# Altium PCB RobotCtrl_V2_Core-board.PcbDoc
Units mil, origin at the board's own origin, x right, y up, seen from the top; angles counter-clockwise.
Board outline 8575 x 6590 mil, 2 copper layers (Top Layer, Bottom Layer); 42 components, 126 nets, 353 pads, 40 vias.
Unrouted connection lines stored in the file: 210.
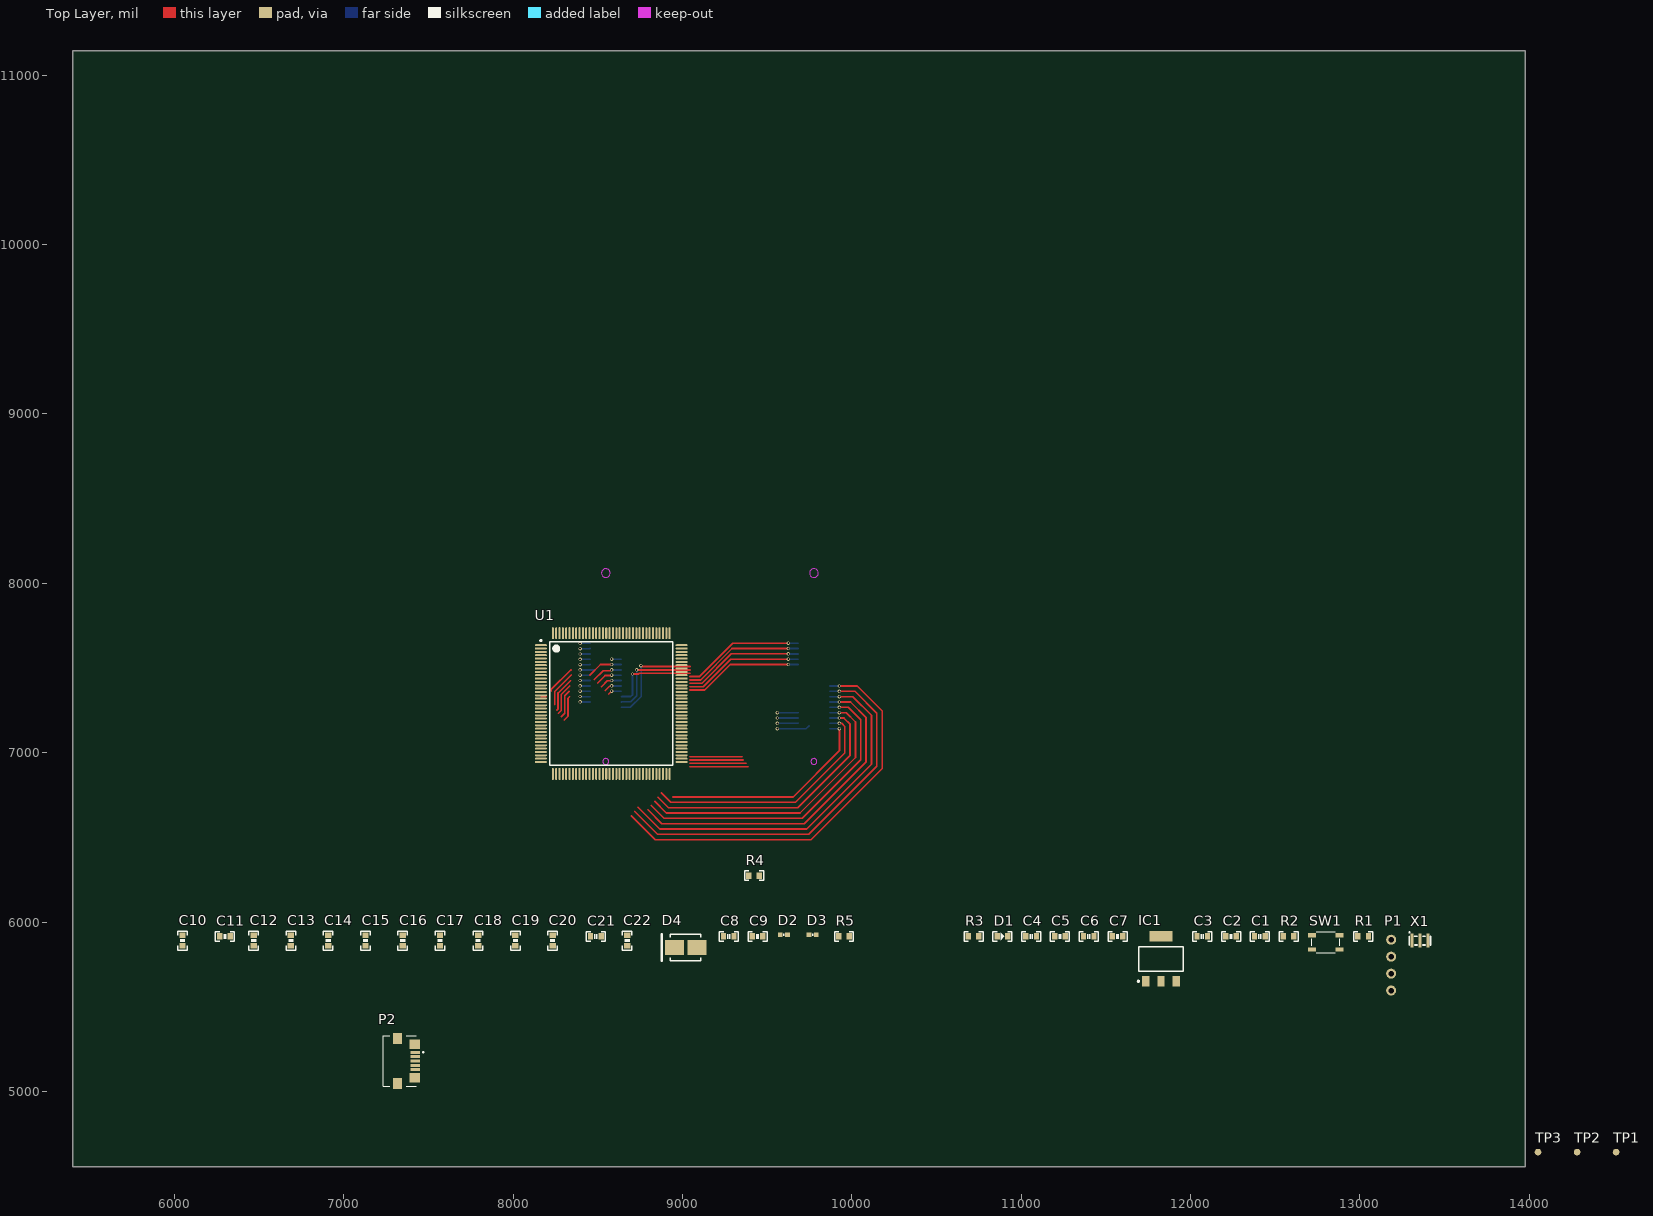
[diagram p0: Top Layer view]
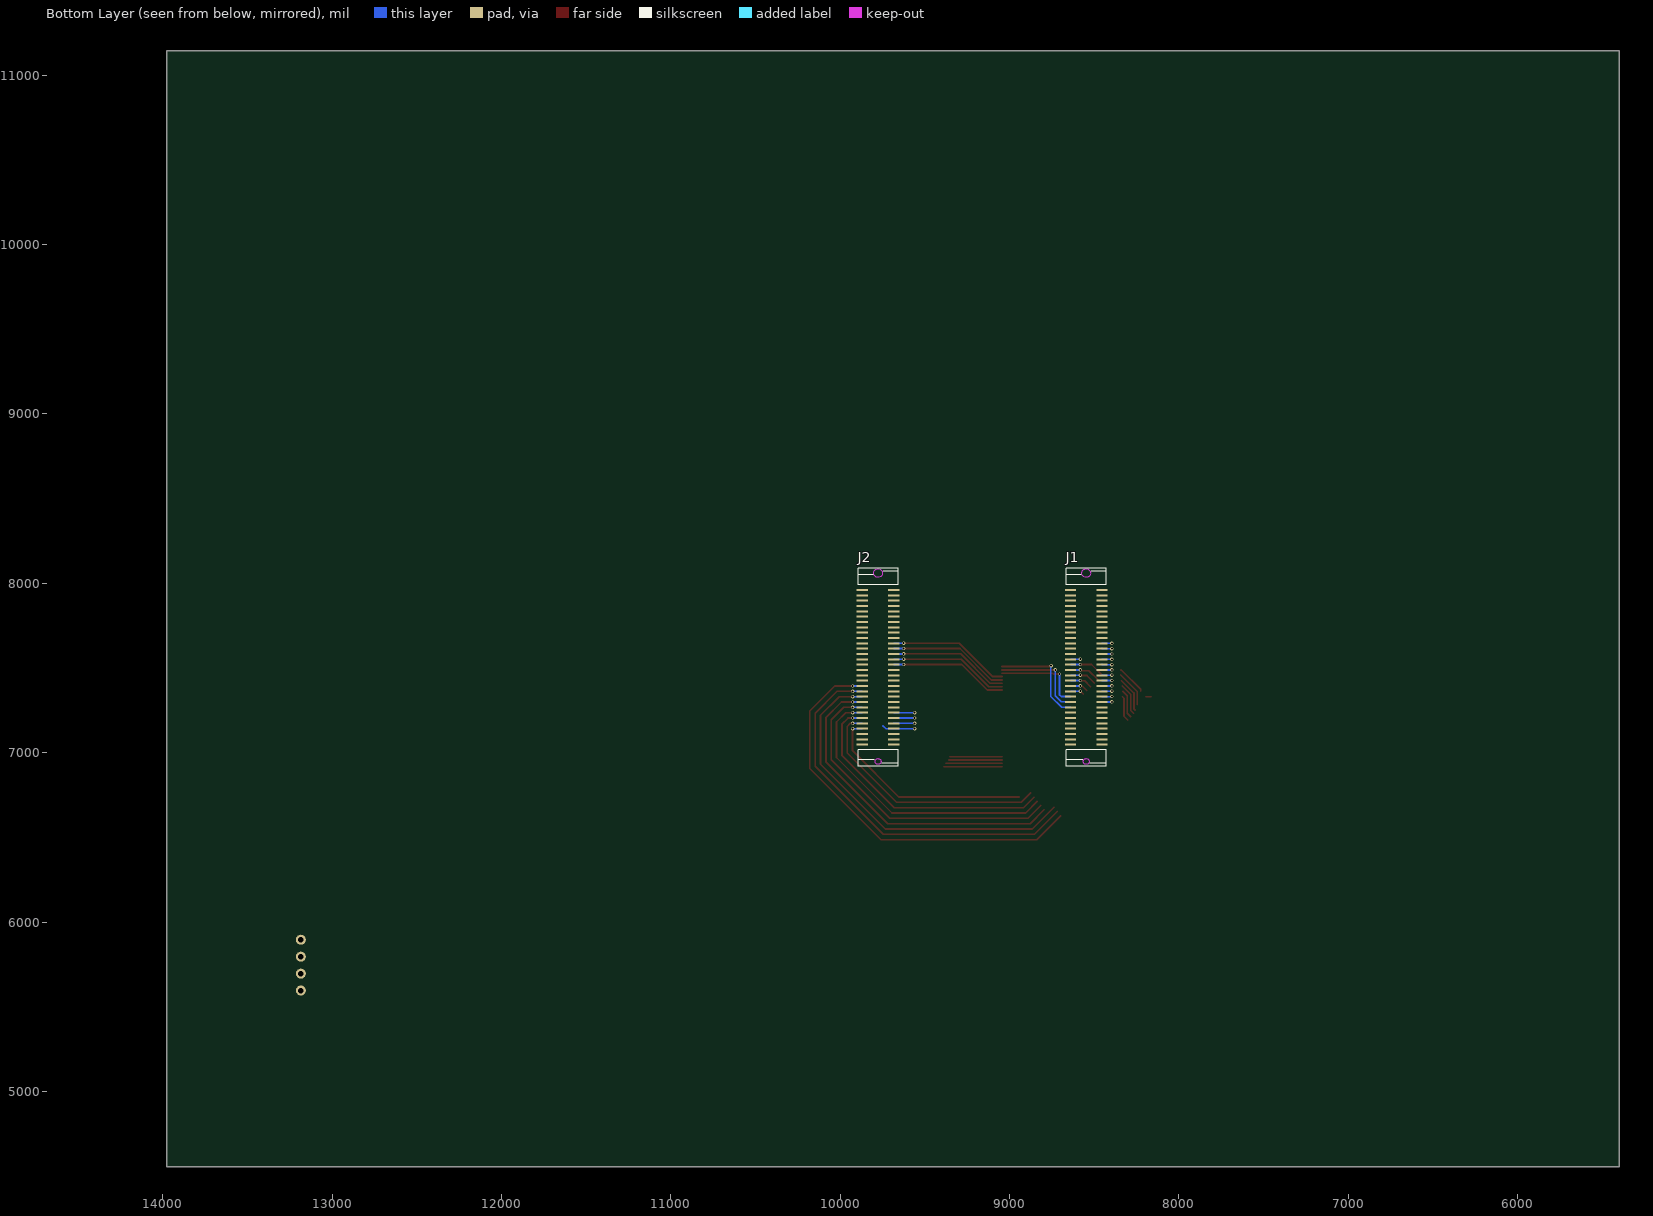
[diagram p1: Bottom Layer view, seen from below]

## Layer stack, top to bottom
Top Solder: solder mask 0.4, Solder Resist, Dk 3.5
Top Layer: signal copper 1.4
Dielectric 1: dielectric 12.6, FR-4, Dk 4.8
Bottom Layer: signal copper 1.4
Bottom Solder: solder mask 0.4, Solder Resist, Dk 3.5

## Board outline
5400,4555 13975,4555 13975,11145 5400,11145

## Design rules (kind name [scope] priority, off if disabled: settings)
Clearance [All] p1: gap=15 ignorepadtopadclearanceinfootprint=FALSE except(0: Arc-Hole Track-Hole SMDPad-Hole THPad-Hole Via-Hole Fill-Hole Poly-Hole Region-Hole Text-Hole; 2: Arc-SMDPad Track-SMDPad SMDPad-SMDPad; 9.6: Arc-Arc Arc-Track Track-Track; 10: Arc-THPad Arc-Via Arc-Text Track-THPad Track-Via Track-Text SMDPad-THPad SMDPad-Via SMDPad-Text THPad-THPad THPad-Via THPad-Text Via-Via Via-Text Fill-Text Poly-Text Region-Text Text-Text)
PlaneConnect [All] p1: planeconnectstyle=Direct reliefexpansion=20 reliefentries=4 reliefconductorwidth=10 reliefairgap=10
PolygonConnect [All] p1: connectstyle=Direct reliefconductorwidth=10 reliefentries=4 polygonreliefangle="90 Angle" airgapwidth=10
RoutingVias [All] p1: holewidth=11.81 width=19.68 viastyle="Through Hole" minholewidth=11.81 minwidth=19.68 maxholewidth=11.81 maxwidth=19.68
SolderMaskExpansion [All] p1: expansion=4 istentingtop=FALSE
Width [All] p1: maxlimit=100 minlimit=10 preferedwidth=10
29 further rules are at their usual default settings.

## Components (designator, comment, footprint, x,y, rotation, side; value= is the part's Value field where it differs from the comment)
C1 "2.2uF" CAP-0603 12409,5915.87 r0 top
C2 "100nF" CAP-0603 12239,5915.87 r0 top
C3 "2.2uF" CAP-0603 12069,5915.87 r0 top
C4 "10uF" CAP-0603 11059,5915.87 r0 top
C5 "100nF" CAP-0603 11229,5915.87 r0 top
C6 "100nF" CAP-0603 11399,5915.87 r0 top
C7 "10uF" CAP-0603 11569,5915.87 r0 top
C8 "1uF" CAP-0603 9274,5915.87 r0 top
C9 "100nF" CAP-0603 9444,5915.87 r0 top
C10 "10uF" CAP-0603 6049,5890.87 r90 top
C11 "100nF" CAP-0603 6299,5915.87 r0 top
C12 "100nF" CAP-0603 6469,5890.87 r90 top
C13 "100nF" CAP-0603 6689,5890.87 r90 top
C14 "100nF" CAP-0603 6909,5890.87 r90 top
C15 "100nF" CAP-0603 7129,5890.87 r90 top
C16 "100nF" CAP-0603 7349,5890.87 r90 top
C17 "100nF" CAP-0603 7569,5890.87 r90 top
C18 "100nF" CAP-0603 7794,5890.87 r90 top
C19 "100nF" CAP-0603 8014,5890.87 r90 top
C20 "100nF" CAP-0603 8234,5890.87 r90 top
C21 "100nF" CAP-0603 8489,5915.87 r0 top
C22 "100nF" CAP-0603 8674,5890.87 r90 top
D1 "RED" LED-0603 10889,5915.87 r0 top
D2 "PESD0402-140" D-0402 9599,5925.87 r0 top
D3 "PESD0402-140" D-0402 9769,5925.87 r0 top
D4 "SMBJ15CA" DO-214AA/SMB 9019,5850.87 r0 top
IC1 "AMS1117-3.3" SOT-223 11849,5775.87 r0 top
J1 "3710M060037G3FT01" 3710M060037G3FT01 8640.04,7047.56 r0 bottom locked
J2 "3710M060037G3FT01" 3710M060037G3FT01 9868.94,7047.56 r0 bottom locked
P1 "HDR1x4_2.54" HDR1x4_2.54_180 13184,5895.87 r0 top
P2 "MicroQTJ" USB-MICRO 7345,5180 r270 top
R1 "10k" R-0603 13019,5915.87 r0 top
R2 "120R" R-0603 12579,5915.87 r0 top
R3 "4.7k" R-0603 10719,5915.87 r0 top
R4 "10R" R-0603 9423,6274 r0 top
R5 "10R" R-0603 9954,5915.87 r0 top
SW1 "KEY" KEY-4P-4.2*3.4*2.5 12799,5880.87 r0 top
TP1 "TestPoint" TestPoint 14512,4642 r90 top
TP2 "TestPoint" TestPoint 14282,4642 r90 top
TP3 "TestPoint" TestPoint 14051,4642 r90 top
U1 "STM32F407ZET6" STM-LQFP144_N 8580,7290 r0 top
X1 "8MHz" SMD3213-3P 13354,5890.87 r0 top

## Footprints (in the part's own frame and the unit in brackets; to place one, negate y for a bottom-side part, rotate by r counter-clockwise, add the part's x,y. Pads: shape width x height; smd on the part's side, far side on the other; paste and mask are expansions set on the pad)
3710M060037G3FT01 [mm]
  rect 1.7x0.3 smd: 1(-4.7,0) 2(-4.7,-0.8) 3(-4.7,-1.6) 4(-4.7,-2.4) 5(-4.7,-3.2) 6(-4.7,-4) 7(-4.7,-4.8) 8(-4.7,-5.6) 9(-4.7,-6.4) 10(-4.7,-7.2) 11(-4.7,-8) 12(-4.7,-8.8) 13(-4.7,-9.6) 14(-4.7,-10.4) 15(-4.7,-11.2) 16(-4.7,-12) 17(-4.7,-12.8) 18(-4.7,-13.6) 19(-4.7,-14.4) 20(-4.7,-15.2) 21(-4.7,-16) 22(-4.7,-16.8) 23(-4.7,-17.6) 24(-4.7,-18.4) 25(-4.7,-19.2) 26(-4.7,-20) 27(-4.7,-20.8) 28(-4.7,-21.6) 29(-4.7,-22.4) 30(-4.7,-23.2) 31(0,-23.2) 32(0,-22.4) 33(0,-21.6) 34(0,-20.8) 35(0,-20) 36(0,-19.2) 37(0,-18.4) 38(0,-17.6) 39(0,-16.8) 40(0,-16) 41(0,-15.2) 42(0,-14.4) 43(0,-13.6) 44(0,-12.8) 45(0,-12) 46(0,-11.2) 47(0,-10.4) 48(0,-9.6) 49(0,-8.8) 50(0,-8) 51(0,-7.2) 52(0,-6.4) 53(0,-5.6) 54(0,-4.8) 55(0,-4) 56(0,-3.2) 57(0,-2.4) 58(0,-1.6) 59(0,-0.8) 60(0,0)
  Keep-Out Layer circle w0.152: c-2.35,-25.725 r0.65
  Keep-Out Layer circle w0.152: c-2.35,2.525 r0.45
  silkscreen extent -5.35,-26.47 0.65,3.27
CAP-0603 [mm]
  rect 0.8x0.96 smd: 1(-0.79,0) 2(0.79,0)
  silkscreen extent -1.42,-0.71 1.42,0.71, body extent -0.76,-0.39 0.76,0.39, height 0.9
D-0402 [mm]
  rect 0.7x0.65 smd: 1(-0.55,0) 2(0.55,0)
  silkscreen extent 0,-0.15 0,0.15, body extent -0.5,-0.25 0.5,0.25, height 0.43
DO-214AA/SMB [mm]
  rect 2.85x2.25 smd: 1(1.675,0) 2(-1.675,0)
  silkscreen extent -3.6,-2 2.3,2, body extent -2.5,-1.97 2.5,1.97, height 2.44
HDR1x4_2.54_180 [mm]
  round 1.5 hole 0.813: 1(0,0) 2(0,-2.54) 3(0,-5.08) 4(0,-7.62)
  body extent -1.25,-8.89 1.25,1.27, height 8.2
KEY-4P-4.2*3.4*2.5 [mm] "SKRPABE010"
  rect 1.2x0.65 smd: 1(-2.075,1.075) 1(2.075,1.075) 2(-2.075,-1.075) 2(2.075,-1.075)
  silkscreen extent -2.15,-1.6 2.05,1.6, body extent -2.35,-1.6 2.25,1.6, height 2.5
LED-0603 [mm]
  rect 0.8x0.96 smd: 1(-0.79,0) 2(0.79,0)
  silkscreen extent -1.42,-0.71 1.42,0.71, body extent -0.81,-0.4 0.81,0.4, height 0.6
R-0603 [mm]
  rect 0.8x0.96 smd: 1(-0.79,0) 2(0.79,0)
  silkscreen extent -1.42,-0.71 1.42,0.71, body extent -0.76,-0.38 0.76,0.38, height 0.41
SMD3213-3P [mm]
  rect 0.4x2.1 smd: 1(-1.2,0) 2(0,0) 3(1.2,0)
  silkscreen extent -1.6,-0.65 1.6,1.27, body extent -1.6,-0.65 1.6,0.65, height 0.7
SOT-223 [mm]
  rect 1.1x1.55 smd: 1(-2.91,-3.197) 2(-0.61,-3.197) 3(1.69,-3.197)
  rect 3.45x1.55 smd: 4(-0.61,3.553)
  silkscreen extent -4.11,-3.3 2.74,2.03, body extent -3.88,-3.38 2.62,3.58, height 1.7
STM-LQFP144_N [mm] "Thin QFP, 144-Leads, Body 20x20mm, Pitch 0.5mm, IPC Medium Density"
  oval 1.8x0.3 smd: 1(-10.55,8.75) 2(-10.55,8.25) 3(-10.55,7.75) 4(-10.55,7.25) 5(-10.55,6.75) 6(-10.55,6.25) 7(-10.55,5.75) 8(-10.55,5.25) 9(-10.55,4.75) 10(-10.55,4.25) 11(-10.55,3.75) 12(-10.55,3.25) 13(-10.55,2.75) 14(-10.55,2.25) 15(-10.55,1.75) 16(-10.55,1.25) 17(-10.55,0.75) 18(-10.55,0.25) 19(-10.55,-0.25) 20(-10.55,-0.75) 21(-10.55,-1.25) 22(-10.55,-1.75) 23(-10.55,-2.25) 24(-10.55,-2.75) 25(-10.55,-3.25) 26(-10.55,-3.75) 27(-10.55,-4.25) 28(-10.55,-4.75) 29(-10.55,-5.25) 30(-10.55,-5.75) 31(-10.55,-6.25) 32(-10.55,-6.75) 33(-10.55,-7.25) 34(-10.55,-7.75) 35(-10.55,-8.25) 36(-10.55,-8.75) 73(10.55,-8.75) 74(10.55,-8.25) 75(10.55,-7.75) 76(10.55,-7.25) 77(10.55,-6.75) 78(10.55,-6.25) 79(10.55,-5.75) 80(10.55,-5.25) 81(10.55,-4.75) 82(10.55,-4.25) 83(10.55,-3.75) 84(10.55,-3.25) 85(10.55,-2.75) 86(10.55,-2.25) 87(10.55,-1.75) 88(10.55,-1.25) 89(10.55,-0.75) 90(10.55,-0.25) 91(10.55,0.25) 92(10.55,0.75) 93(10.55,1.25) 94(10.55,1.75) 95(10.55,2.25) 96(10.55,2.75) 97(10.55,3.25) 98(10.55,3.75) 99(10.55,4.25) 100(10.55,4.75) 101(10.55,5.25) 102(10.55,5.75) 103(10.55,6.25) 104(10.55,6.75) 105(10.55,7.25) 106(10.55,7.75) 107(10.55,8.25) 108(10.55,8.75)
  oval 0.3x1.8 smd: 37(-8.75,-10.55) 38(-8.25,-10.55) 39(-7.75,-10.55) 40(-7.25,-10.55) 41(-6.75,-10.55) 42(-6.25,-10.55) 43(-5.75,-10.55) 44(-5.25,-10.55) 45(-4.75,-10.55) 46(-4.25,-10.55) 47(-3.75,-10.55) 48(-3.25,-10.55) 49(-2.75,-10.55) 50(-2.25,-10.55) 51(-1.75,-10.55) 52(-1.25,-10.55) 53(-0.75,-10.55) 54(-0.25,-10.55) 55(0.25,-10.55) 56(0.75,-10.55) 57(1.25,-10.55) 58(1.75,-10.55) 59(2.25,-10.55) 60(2.75,-10.55) 61(3.25,-10.55) 62(3.75,-10.55) 63(4.25,-10.55) 64(4.75,-10.55) 65(5.25,-10.55) 66(5.75,-10.55) 67(6.25,-10.55) 68(6.75,-10.55) 69(7.25,-10.55) 70(7.75,-10.55) 71(8.25,-10.55) 72(8.75,-10.55) 109(8.75,10.55) 110(8.25,10.55) 111(7.75,10.55) 112(7.25,10.55) 113(6.75,10.55) 114(6.25,10.55) 115(5.75,10.55) 116(5.25,10.55) 117(4.75,10.55) 118(4.25,10.55) 119(3.75,10.55) 120(3.25,10.55) 121(2.75,10.55) 122(2.25,10.55) 123(1.75,10.55) 124(1.25,10.55) 125(0.75,10.55) 126(0.25,10.55) 127(-0.25,10.55) 128(-0.75,10.55) 129(-1.25,10.55) 130(-1.75,10.55) 131(-2.25,10.55) 132(-2.75,10.55) 133(-3.25,10.55) 134(-3.75,10.55) 135(-4.25,10.55) 136(-4.75,10.55) 137(-5.25,10.55) 138(-5.75,10.55) 139(-6.25,10.55) 140(-6.75,10.55) 141(-7.25,10.55) 142(-7.75,10.55) 143(-8.25,10.55) 144(-8.75,10.55)
  silkscreen extent -10.67,-9.25 9.25,9.57, body extent -10,-10 10,10, height 1.6
TestPoint [mm]
  round 1 smd: 1(0,0)
USB-MICRO [mm]
  rect 0.45x1.38 smd: 1(-1.3,1.975) 2(-0.65,1.975) 3(0,1.975) 4(0.65,1.975) 5(1.3,1.975)
  rect 1.65x1.3 smd: EH(-3.375,-0.685) EH(3.375,-0.685)
  rect 1.425x1.55 smd: EH(-2.487,1.89) EH(2.487,1.89)
  silkscreen extent -3.75,-2.84 3.75,3.26, body extent -3.9,-2.5 3.9,2.5, height 2.72

## Part data
C1 C2 C3 C4 C5 C6 C7 C8 C9 C10 C11 C12 C13 C14 C15 C16 C17 C18 C19 C20 C21 C22: library part CAP, "贴片电容", Package=0402, SuppliersPartNumber=C52923, ComponentLink1Description=供应商链接, ComponentLink1URL=http://www.szlcsc.com/product/details_53938.html, Supplier=LC
D1: library part LED, "发光二极管", Package=0603, SuppliersPartNumber=C2290, ComponentLink1Description=供应商链接, ComponentLink1URL=http://www.szlcsc.com/product/details_2663.html, Supplier=LC
D2 D3 D4: library part TVS_C
IC1: library part AMS1117, "AMS1117-3.3 1.0A", Manufacturer_Name=Nexperia, Manufacturer_Part_Number=SI2302DS, Mouser Part Number=N/A, RS Part Number=7983053P, Datasheet Link=https://assets.nexperia.com/documents/data-sheet/SI2302DS.pdf, Height=1.1mm, Mouser Price/Stock=https://www.mouser.com/Search/Refine.aspx?Keyword=N%2FA, RS Price/Stock=http://uk.rs-online.com/web/p/products/7983053P
J1 J2: library part 3710M/F, "B2B Connector"
P1: "Header"
P2: library part USB_MICRO, "USB_MICRO"
R1 R2 R3 R4 R5: library part RES, "贴片电阻", Package=0805, SuppliersPartNumber=C17798, Supplier=LC
SW1: "按键开关"
TP1 TP2 TP3: "测试点"
U1: "ARM Cortex-M4 32-bit MCU+FPU, 210 DMIPS, 512 kB Flash, 192 kB Internal RAM, 114 I/Os, 144-pin LQFP, -40 to 85 degC, Tray", I/Os (High Current)=114, Manufacturer=STMicroelectronics, Operating Frequency(F) (Processor speed) (MHz)=168, Supplier Part Number 1=497-11903-ND, Supply Voltage(Vcc) max (V)=3.6, Supply Voltage(Vcc) min (V)=1.8, ComponentLink1Description="Manufacturer URL", ComponentLink1URL=http://www.st.com/web/en/home.html, ComponentLink2Description=Datasheet, ComponentLink2URL=http://www.st.com/st-web-ui/static/active/en/resource/technical/document/datasheet/DM00037051.pdf, ComponentLink3Description="Package Specification", ComponentLink3URL=http://www.st.com/st-web-ui/static/active/en/resource/technical/document/datasheet/DM00037051.pdf, Core="ARM Cortex-M4", D/A Converter=2x12-bit, DatasheetVersion="Rev. 4", FLASH Size (Prog) (kB)=512, Internal RAM Size (kB)=192, Mounting Technology="Surface Mount", PackageDescription="144-Pin Low Profile Quad Flat Package, 20 x 20 mm Body, 0.5 mm Pitch", PackageReference=LQFP144, PackageVersion="Rev. 4, 06/2013", Packing=Tray, PartNumber=STM32F407ZET6, Supplier 1=Digi-Key, Supplier 2=Farnell, Supplier 3=Newark, Supplier 4=Newark, Supplier 5=Mouser, Supplier Part Number 2=2215229, Supplier Part Number 3=46W2203, Supplier Part Number 4=87T3795, Supplier Part Number 5=511-STM32F407ZET6
X1: library part XTAL, "CSTCE8M00G15C99-R0"

## Via types
v1: diameter 19.68, hole 11.81, Top Layer to Bottom Layer, 40 vias

## Nets (pads, with @x,y where several pads share a name; then routed paths per layer and width w, separated by ;. In a path a pad name is that pad's centre, name@x,y a point inside that pad or via, vN(x,y) a via of type N, cw(c..) or ccw(c..) an arc to the next point about the centre after c; other vN are vias at no path point)
GND: C1.2 C2.1 C3.2 C4.1 C5.1 C6.1 C7.1 C8.1 C9.1 C10.1 C11.1 C12.1 C13.1 C14.1 C15.1 C16.1 C17.1 C18.1 C19.1 C20.1 C21.1 C22.1 D1.2 D2.1 D3.1 D4.2 IC1.1 J1.1 J1.30 J2.31 P1.1 P2.5 R1.1 SW1.2 TP3.1 U1.16 U1.31 U1.38 U1.51 U1.61 U1.83 U1.94 U1.107 U1.120 U1.130 X1.2
NetC1_1: C1.1 U1.71
NetC2_2: C2.2 SW1.1 U1.25
NetC3_1: C3.1 U1.106
NetD1_A: D1.1 R3.1
NetD4_1: D4.1 P2.EH
NetP2_2: P2.2 R4.2
NetP2_3: P2.3 R5.2
NetR1_2: R1.2 U1.138
NetR2_2: R2.2 U1.143
NetU1_23: U1.23 X1.3
NetU1_24: U1.24 X1.1
PA0: J2.42 U1.34
PA1: J1.3 U1.35
PA2: J1.4 U1.36
PA3: J1.44 U1.37 | length 57.9
  Bottom Layer w10: v1(8582,7551.98) 8582.24,7551.74 J1.44@8639.8,7551.74
PA4: J1.45 U1.40 | length 212
  Top Layer w10: 8453.93,7457.64 8516.77,7520.48 v1(8582,7520.48)
  Bottom Layer w10: v1(8582,7520.48) 8582.24,7520.24 J1.45@8639.8,7520.24
PA5: J1.46 U1.41 | length 183.9
  Top Layer w10: 8479.62,7431.94 8531.82,7484.14 8574.54,7484.14 8579.38,7488.98 v1(8582,7488.98)
  Bottom Layer w10: v1(8582,7488.98) 8582.24,7488.74 J1.46@8639.8,7488.74
PA6: J1.47 U1.42 | length 159.1
  Top Layer w10: 8499.78,7411.78 8543.63,7455.64 8580.15,7455.64 v1(8582,7457.49)
  Bottom Layer w10: v1(8582,7457.49) 8582.24,7457.25 J1.47@8639.8,7457.25
PA7: J1.48 U1.43 | length 133
  Top Layer w10: 8522.05,7389.51 8556.68,7424.14 8580.15,7424.14 v1(8582,7425.99)
  Bottom Layer w10: v1(8582,7425.99) 8582.24,7425.75 J1.48@8639.8,7425.75
PA8: J2.20 U1.100 | length 720.4
  Top Layer w10: 9045,7449.37 9099.37,7449.37 9296.46,7646.46 v1(9625.86,7646.46)
  Bottom Layer w10: v1(9625.86,7646.46) 9626.1,7646.22 J2.20@9683.66,7646.22
PA9: J1.51 U1.101 | length 535.3
  Top Layer w10: v1(8705.16,7465) 8705.87,7464.29 8719.58,7464.29 8719.71,7464.16 8740.29,7464.16 8745.19,7469.06 9045,7469.06
  Bottom Layer w10: J1.51@8640.28,7330.78 8641.43,7331.93 8694.93,7331.93 8706,7343 8706,7464.16 v1(8705.16,7465)
PA10: J1.52 U1.102 | length 572.7
  Top Layer w10: v1(8730,7489) 8730.17,7488.83 9044.91,7488.83 9045,7488.74
  Bottom Layer w10: J1.52@8640.52,7299.53 8641.43,7300.43 8694.43,7300.43 8730,7336 v1(8730,7489)
PA11: D2.2 J1.53 R4.1 U1.103 | length 618
  Top Layer w10: v1(8755,7513.67) 8757.62,7513.67 8762.86,7508.43 9045,7508.43
  Bottom Layer w10: J1.53 8693.03,7268.03 8756.84,7331.84 8756.84,7511.83 v1(8755,7513.67)
PA12: D3.2 J1.54 R5.1 U1.104
PA13: J1.43 P1.3 U1.105
PA14: J1.42 P1.2 U1.109
PA15: J1.41 U1.110
PB0: J1.56 U1.46
PB1: J1.57 U1.47
PB2: J1.55 U1.48
PB3: J1.21 U1.133
PB4: J1.22 U1.134
PB5: J1.23 U1.135
PB6: J1.24 U1.136
PB7: J1.25 U1.137
PB8: J1.26 U1.139
PB9: J1.27 U1.140
PB10: J2.2 U1.69
PB11: J2.1 U1.70
PB12: J2.4 U1.73 | length 537.7
  Top Layer w10: 9045,6917.87 9387.87,6917.87
  Bottom Layer w10: v1(9560.23,7142.28) 9683.15,7142.28 J2.4@9683.4,7142.03 ; J2.4 9730.05,7142.05 9748,7160
PB13: J2.5 U1.74 | length 455.8
  Top Layer w10: 9045,6937.56 9377.56,6937.56
  Bottom Layer w10: v1(9560.23,7173.78) 9683.15,7173.78 J2.5@9683.4,7173.52
PB14: J2.6 U1.75 | length 438.4
  Top Layer w10: 9045,6957.24 9360.08,6957.24
  Bottom Layer w10: v1(9560.23,7205.27) 9683.15,7205.27 J2.6@9683.4,7205.02
PB15: J2.7 U1.76 | length 430.2
  Top Layer w10: 9045,6976.93 9351.93,6976.93
  Bottom Layer w10: v1(9560.23,7236.77) 9683.15,7236.77 J2.7@9683.4,7236.52
PC0: U1.26
PC1: J1.9 U1.27 | length 57.6
  Bottom Layer w10: v1@8397.2,7299.77 J1.9@8454.76,7299.77
  other v1: 8396.96,7300.01
PC2: U1.28
PC3: U1.29
PC4: J1.49 U1.44 | length 107.1
  Top Layer w10: 8543.94,7367.62 8569.5,7393.18 8580.69,7393.18 v1(8582,7394.5)
  Bottom Layer w10: v1(8582,7394.5) 8582.24,7394.26 J1.49@8639.8,7394.26
PC5: J1.50 U1.45 | length 81.5
  Top Layer w10: 8565.28,7346.28 v1(8582,7363)
  Bottom Layer w10: v1(8582,7363) 8582.24,7362.76 J1.50@8639.8,7362.76
PC6: J2.16 U1.96 | length 700.8
  Top Layer w10: 9045,7370.63 9131.99,7370.63 9281.84,7520.48 v1(9625.86,7520.48)
  Bottom Layer w10: v1(9625.86,7520.48) 9626.1,7520.24 J2.16@9683.66,7520.24
PC7: J2.17 U1.97 | length 705.7
  Top Layer w10: 9045,7390.31 9123.83,7390.31 9285.49,7551.98 v1(9625.86,7551.98)
  Bottom Layer w10: v1(9625.86,7551.98) 9626.1,7551.74 J2.17@9683.66,7551.74
PC8: J2.18 U1.98 | length 710.6
  Top Layer w10: 9045,7410 9115.68,7410 9289.15,7583.47 v1(9625.86,7583.47)
  Bottom Layer w10: v1(9625.86,7583.47) 9626.1,7583.23 J2.18@9683.66,7583.23
PC9: J2.19 U1.99 | length 715.5
  Top Layer w10: 9045,7429.68 9107.52,7429.68 9292.81,7614.97 v1(9625.86,7614.97)
  Bottom Layer w10: v1(9625.86,7614.97) 9626.1,7614.73 J2.19@9683.66,7614.73
PC10: J1.40 U1.111
PC11: J1.39 U1.112
PC12: J1.38 U1.113
PC13: J1.28 U1.7
PC14: U1.8
PC15: U1.9
PD0: J2.47 U1.114
PD1: J2.48 U1.115
PD2: J1.37 U1.116
PD3: J1.36 U1.117
PD4: J2.26 U1.118
PD5: J2.22 U1.119
PD6: J2.27 U1.122
PD7: J1.35 U1.123
PD8: J2.58 U1.77
PD9: J2.59 U1.78
PD10: J2.60 U1.79
PD11: U1.80
PD12: J2.21 U1.81
PD13: J2.14 J2.23 U1.82
PD14: J2.45 U1.85
PD15: J2.46 U1.86
PE0: J2.43 U1.141
PE1: J2.44 U1.142
PE2: J1.20 U1.1 | length 58.8
  Bottom Layer w10: v1@8397.94,7645.48 J1.20@8455.5,7645.48 ; J1.20@8454.09,7646.89 J1.20
  other v1: 8396.96,7645.72
PE3: J1.19 U1.2 | length 58.8
  Bottom Layer w10: v1@8397.94,7613.99 J1.19@8455.5,7613.99 ; J1.19@8454.09,7615.39 J1.19
  other v1: 8396.96,7614.23
PE4: J1.18 U1.3 | length 58.8
  Bottom Layer w10: v1@8397.94,7582.49 J1.18@8455.5,7582.49 ; J1.18@8454.09,7583.9 J1.18
  other v1: 8396.96,7582.73
PE5: J1.17 U1.4 | length 58.8
  Bottom Layer w10: v1@8397.94,7551 J1.17@8455.5,7551 ; J1.17@8454.09,7552.4 J1.17
  other v1: 8396.96,7551.24
PE6: J1.16 U1.5 | length 58.8
  Bottom Layer w10: v1@8397.94,7519.5 J1.16@8455.5,7519.5 ; J1.16@8454.09,7520.91 J1.16
  other v1: 8396.96,7519.74
PE7: J2.49 U1.58 | length 2423.3
  Top Layer w10: 8698.54,6628.12 8839.66,6487 9759.34,6487 10178.97,6906.63 10178.97,7246.37 10031.8,7393.54 v1(9926.98,7393.54)
  Bottom Layer w10: J2.49@9869.18,7393.78 9926.74,7393.78 v1(9926.98,7393.54)
PE8: J2.50 U1.59 | length 2296.5
  Top Layer w10: 8718.23,6652.98 8852.71,6518.5 9746.29,6518.5 10147.47,6919.68 10147.47,7233.32 10018.76,7362.04 v1(9926.98,7362.04)
  Bottom Layer w10: J2.50@9869.18,7362.28 9926.74,7362.28 v1(9926.98,7362.04)
PE9: J2.51 U1.60 | length 2169.7
  Top Layer w10: 8737.91,6677.83 8865.76,6549.99 9733.25,6549.99 10115.98,6932.72 10115.98,7220.28 10005.71,7330.54 v1(9926.98,7330.54)
  Bottom Layer w10: J2.51@9869.18,7330.78 9926.74,7330.78 v1(9926.98,7330.54)
PE10: J2.52 U1.63 | length 1987.2
  Top Layer w10: 8796.97,6663.32 8878.8,6581.49 9720.2,6581.49 10084.48,6945.77 10084.48,7207.23 9992.66,7299.05 v1(9926.98,7299.05)
  Bottom Layer w10: J2.52@9869.18,7299.29 9926.74,7299.29 v1(9926.98,7299.05)
PE11: J2.53 U1.64 | length 1860.4
  Top Layer w10: 8816.65,6688.18 8891.85,6612.98 9707.15,6612.98 10052.98,6958.82 10052.98,7194.18 9979.62,7267.55 v1(9926.98,7267.55)
  Bottom Layer w10: J2.53@9869.18,7267.79 9926.74,7267.79 v1(9926.98,7267.55)
PE12: J2.54 U1.65 | length 1733.6
  Top Layer w10: 8836.34,6713.04 8904.89,6644.48 9694.11,6644.48 10021.49,6971.86 10021.49,7181.14 9966.57,7236.06 v1(9926.98,7236.06)
  Bottom Layer w10: J2.54@9869.18,7236.3 9926.74,7236.3 v1(9926.98,7236.06)
PE13: J2.55 U1.66 | length 1606.8
  Top Layer w10: 8856.02,6737.89 8917.94,6675.98 9681.06,6675.98 9989.99,6984.91 9989.99,7168.09 9953.53,7204.56 v1(9926.98,7204.56)
  Bottom Layer w10: J2.55@9869.18,7204.8 9926.74,7204.8 v1(9926.98,7204.56)
PE14: J2.56 U1.67 | length 1480
  Top Layer w10: 8875.71,6762.75 8930.99,6707.47 9668.01,6707.47 9958.5,6997.95 9958.5,7155.05 9940.48,7173.06 v1(9926.98,7173.06)
  Bottom Layer w10: J2.56@9869.18,7173.3 9926.74,7173.3 v1(9926.98,7173.06)
PE15: J2.57 U1.68 | length 1285.6
  Top Layer w10: 8944.03,6738.97 9654.97,6738.97 9927,7011 v1(9926.98,7141.57) ; v1(9926.98,7141.57) 9927,7142 9927.43,7141.57 v1(9926.98,7141.57)
  Bottom Layer w10: J2.57@9869.18,7141.81 9926.74,7141.81 v1(9926.98,7141.57)
PF0: U1.10
PF1: U1.11
PF2: U1.12
PF3: U1.13
PF4: U1.14
PF5: J1.15 U1.15 | length 290.6
  Top Layer w10: 8164.65,7331.26 8194.26,7331.26 ; 8226.61,7363.61 8226.61,7374.75 8339.01,7487.15 8342.15,7487.15 8344,7489
  Bottom Layer w10: v1@8397.2,7488.74 J1.15@8454.76,7488.74 ; J1.15 J1.15@8482.56,7488.5
  other v1: 8396.96,7488.98
PF6: J1.14 U1.18 | length 274
  Top Layer w10: 8246.21,7283.34 8246.21,7361.35 8343.36,7458.49
  Bottom Layer w10: v1@8397.2,7457.25 J1.14@8454.76,7457.25 ; J1.14@8454.26,7457.75 J1.14
  other v1: 8396.96,7457.49
PF7: J1.13 U1.19 | length 263.4
  Top Layer w10: 8259.95,7252.52 8265.81,7258.38 8265.81,7351.95 8339.35,7425.49
  Bottom Layer w10: v1@8397.2,7425.75 J1.13@8454.76,7425.75
  other v1: 8396.96,7425.99
PF8: J1.12 U1.20 | length 246.4
  Top Layer w10: 8268.7,7232.83 8285.41,7249.55 8285.41,7343.84 8335.57,7393.99
  Bottom Layer w10: v1@8397.2,7394.26 J1.12@8454.76,7394.26
  other v1: 8396.96,7394.5
PF9: J1.11 U1.21 | length 226.2
  Top Layer w10: 8285.15,7213.15 8305.01,7233.01 8305.01,7335.72 8331.79,7362.5
  Bottom Layer w10: v1@8397.2,7362.76 J1.11@8454.76,7362.76
  other v1: 8396.96,7363
PF10: J1.10 U1.22 | length 208
  Top Layer w10: 8302.46,7193.46 8324.61,7215.61 8324.61,7322.05 8333.56,7331
  Bottom Layer w10: v1@8397.2,7331.26 J1.10@8454.76,7331.26
  other v1: 8396.96,7331.5
PF11: U1.49
PF12: U1.50
PF13: U1.53
PF14: U1.54
PF15: U1.55
PG0: U1.56
PG1: U1.57
PG2: U1.87
PG3: J2.13 U1.88
PG4: U1.89
PG5: U1.90
PG6: J2.15 U1.91
PG7: U1.92
PG8: U1.93
PG9: U1.124
PG10: J1.34 U1.125
PG11: J2.35 U1.126
PG12: J2.25 U1.127
PG13: J1.33 U1.128
PG14: J1.32 U1.129
PG15: U1.132
VBUS: C4.2 C5.2 IC1.3 J1.58 J1.59 J1.60 P2.1 TP1.1
VCC_3V3: C6.2 C7.2 C8.2 C9.2 C10.2 C11.2 C12.2 C13.2 C14.2 C15.2 C16.2 C17.2 C18.2 C19.2 C20.2 C21.2 C22.2 IC1.2 P1.4 R2.1 R3.2 TP2.1 U1.6 U1.17 U1.30 U1.32 U1.33 U1.39 U1.52 U1.62 U1.72 U1.84 U1.95 U1.108 U1.121 U1.131 U1.144
pads on no net: IC1.4 J1.2 J1.5 J1.6 J1.7 J1.8 J1.29 J1.31 J2.3 J2.8 J2.9 J2.10 J2.11 J2.12 J2.24 J2.28 J2.29 J2.30 J2.32 J2.33 J2.34 J2.36 J2.37 J2.38 J2.39 J2.40 J2.41 P2.4

## Silkscreen, mask and mechanical layers (free items; w line width, h text height)
Mechanical 1:
  the board outline again, w10